# Altium PCB DashBoardLed.PcbDoc
Units mm, origin at the board's own origin, x right, y up, seen from the top; angles counter-clockwise.
Board outline 80 x 50 mm, 2 copper layers (Top Layer, Bottom Layer); 40 components, 57 nets, 211 pads, 53 vias.
Unrouted connection lines stored in the file: 27.
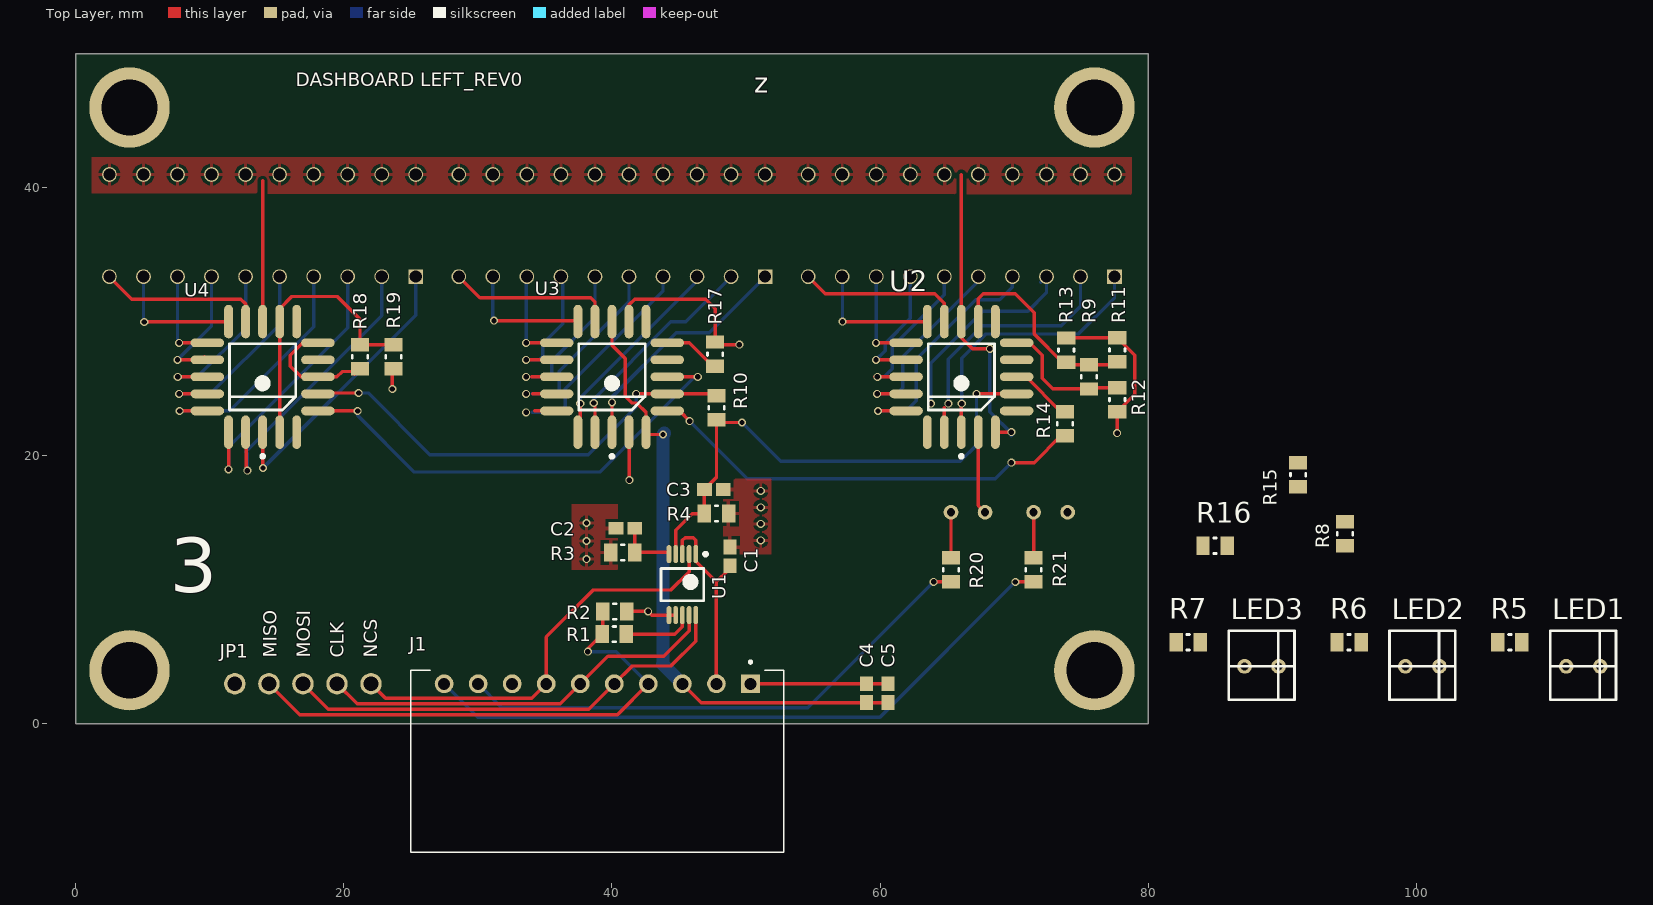
[diagram p0: Top Layer view]
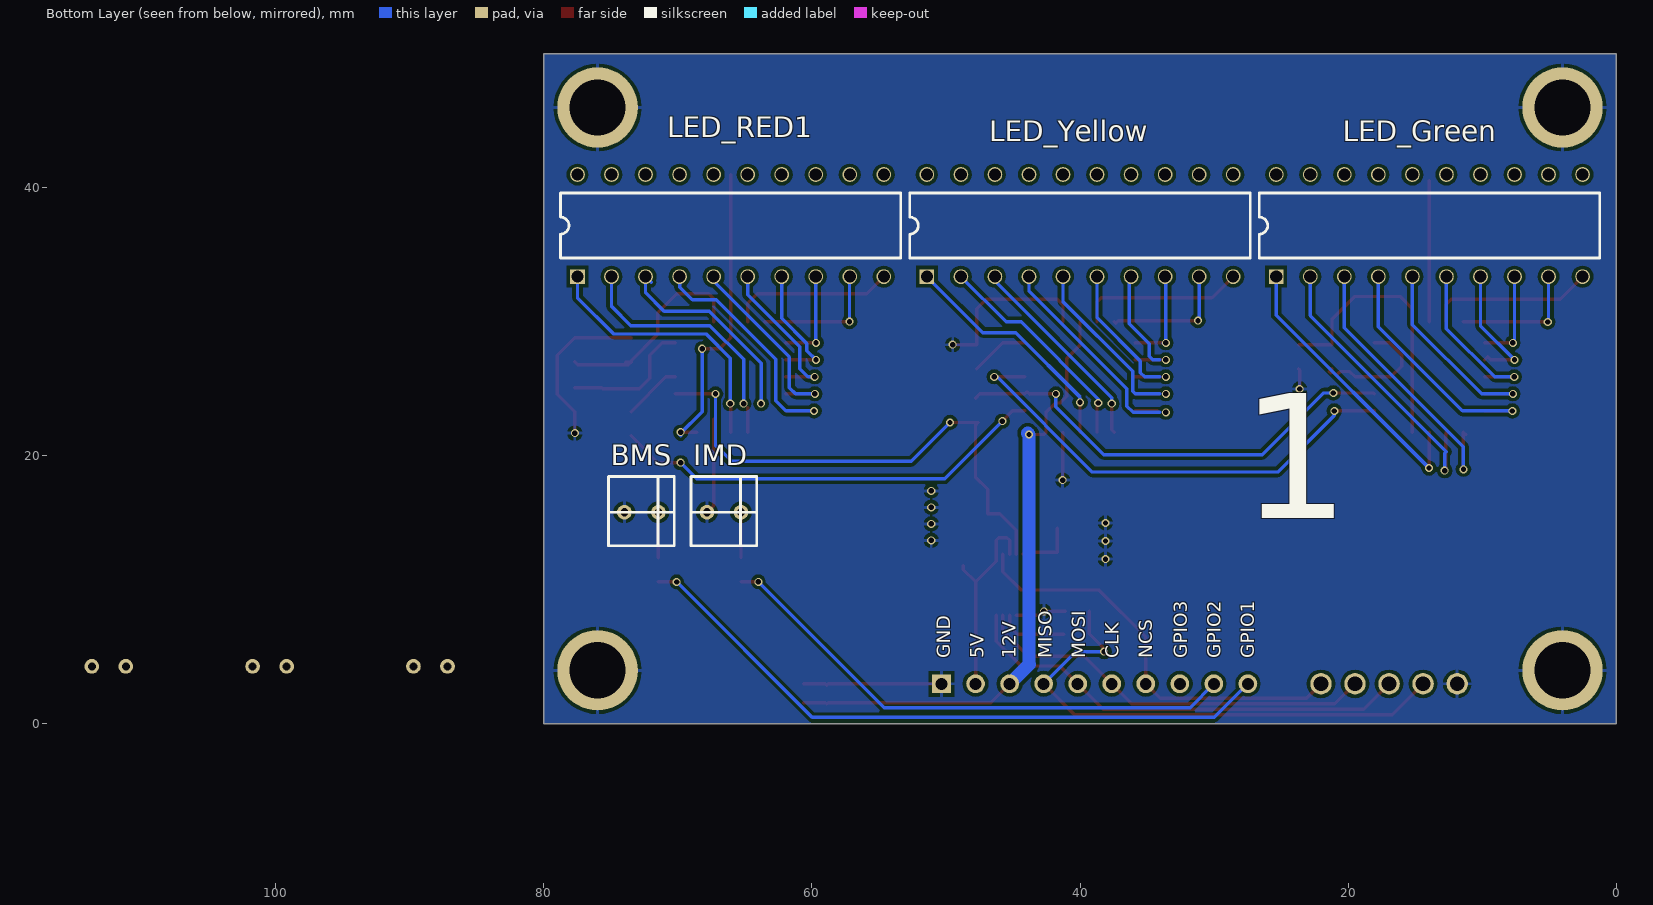
[diagram p1: Bottom Layer view, seen from below]

## Layer stack, top to bottom
Top Solder: solder mask 0.0102, Solder Resist, Dk 3.5
Top Layer: signal copper 0.0356
Dielectric 1: dielectric 0.32, FR-4, Dk 4.8
Bottom Layer: signal copper 0.0356
Bottom Solder: solder mask 0.0102, Solder Resist, Dk 3.5

## Board outline
0,0 80,0 80,50 0,50

## Design rules (kind name [scope] priority, off if disabled: settings)
Clearance [All] p1: gap=0.254 ignorepadtopadclearanceinfootprint=TRUE except(0: Arc-Hole Track-Hole SMDPad-Hole THPad-Hole Via-Hole Fill-Hole Poly-Hole Region-Hole Text-Hole; 0.1: Arc-Arc Arc-Track Arc-SMDPad Track-Track Track-SMDPad)
PolygonConnect [All] p1: connectstyle=Relief reliefconductorwidth=0.254 reliefentries=4 polygonreliefangle="90 Angle" airgapwidth=0.254
RoutingVias [All] p1: holewidth=0.711 width=1.27 viastyle="Through Hole" minholewidth=0.711 minwidth=1.27 maxholewidth=0.711 maxwidth=1.27
SolderMaskExpansion [All] p1: expansion=0.102
Width [All] p1: maxlimit=2 minlimit=0.1 preferedwidth=0.254 minimp=50.000000 maximp=50.000000 favimp=50.000000
30 further rules are at their usual default settings.

## Classes and differential pairs
component class SecondSheet: C4 C5 LED_Green LED_RED1 LED_Yellow R8 R9 R10 R11 R12 R13 R14 R15 R17 R18 R19 U3 U4
component class DAC_Schematic: BMS C1 C2 C3 IMD J1 JP1 LED1 LED2 LED3 R1 R2 R3 R4 R5 R6 R7 R20 R21 U2

## Components (designator, comment, footprint, x,y, rotation, side; value= is the part's Value field where it differs from the comment)
BMS "C503B-RAN-CZ0C0AA1" Diode 74,15.8 r180 bottom
C1 "0.1 uF" CAPC1608X09N 48.8,12.5 r270 top
C2 "0.1 uF" CAPC1608X09N 41,14.6 r0 top
C3 "0.1 uF" CAPC1608X09N 47.6,17.5 r180 top
C4 "0.1 uF" CAPC1608X09N 59,2.3 r90 top
C5 "1nF" CAPC1608X09N 60.6,2.3 r90 top
IMD "C503B-RAN-CZ0C0AA1" Diode 67.84,15.8 r180 bottom
J1 "103635-9" *TE_103635-9 38.904,3 r180 top
JP1 "61300511121" 5PIN_HEADER 22.02,3 r180 top
LED1 "C503B-RAN-CZ0C0AA1" Diode 111.2,4.3 r0 top
LED2 "C503B-RAN-CZ0C0AA1" Diode 99.2,4.3 r0 top
LED3 "C503B-RAN-CZ0C0AA1" Diode 87.2,4.3 r0 top
LED_Green "Green" DIP20 25.36,33.38 r90 bottom
LED_RED1 "RED" DIP20 77.5,33.38 r90 bottom
LED_Yellow "Yellow" DIP20 51.43,33.38 r90 bottom
R1 "1K Ohm" RESC2012X06N 40.174,6.7 r180 top
R2 "2.2k Ohm" RESC2012X06N 40.2,8.4 r180 top
R3 "10k" RESC2012X06N 40.8,12.8 r0 top
R4 "10k" RESC2012X06N 47.8,15.7 r180 top
R5 "220 Ohm" RESC2012X06N 107,6.1 r0 top
R6 "220 Ohm" RESC2012X06N 95,6.1 r0 top
R7 "220 Ohm" RESC2012X06N 83,6.1 r0 top
R8 "0 Ohm" RESC2012X06N 94.7,14.2 r270 top
R9 "2.2k Ohm" RESC2012X06N 75.6,25.9 r270 top
R10 "0 Ohm" RESC2012X06N 47.794,23.6 r270 top
R11 "3.3k Ohm" RESC2012X06N 77.7,27.925 r270 top
R12 "1k" RESC2012X06N 77.7,24.195 r90 top
R13 "0 Ohm" RESC2012X06N 73.9,27.9 r270 top
R14 "0 Ohm" RESC2012X06N 73.8,22.4 r90 top
R15 "0 Ohm" RESC2012X06N 91.2,18.6 r270 top
R16 "0 Ohm" RESC2012X06N 85,13.3 r180 top
R17 "1K Ohm" RESC2012X06N 47.7,27.6 r270 top
R18 "2.2k Ohm" RESC2012X06N 21.2,27.4 r270 top
R19 "3.3k Ohm" RESC2012X06N 23.7,27.4 r90 top
R20 "220 Ohm" RESC2012X06N 65.3,11.5 r90 top
R21 "220 Ohm" RESC2012X06N 71.46,11.5 r90 top
U1 "DAC" TSSOP50P490X110-10N 45.254,10.4 r270 top
U2 "LM3914VX/NOPB" PLCC127P990X990X457-20N 66.07,25.9 r180 top
U3 "LM3914VX/NOPB" PLCC127P990X990X457-20N 40,25.9 r180 top
U4 "LM3914VX/NOPB" PLCC127P990X990X457-20N 13.93,25.9 r180 top

## Footprints (in the part's own frame and the unit in brackets; to place one, negate y for a bottom-side part, rotate by r counter-clockwise, add the part's x,y. Pads: shape width x height; smd on the part's side, far side on the other; paste and mask are expansions set on the pad)
5PIN_HEADER [mm]
  round 1.6 hole 1.1: 1(0,0) 2(2.54,0) 3(5.08,0) 4(7.62,0) 5(10.16,0)
  body extent -1.27,-1.27 11.43,1.27, height 9.5
*TE_103635-9 [mm]
  rect 1.398x1.398 hole 0.89: 1(-11.43,0)
  round 1.398 hole 0.89: 2(-8.89,0) 3(-6.35,0) 4(-3.81,0) 5(-1.27,0) 6(1.27,0) 7(3.81,0) 8(6.35,0) 9(8.89,0) 10(11.43,0)
  silkscreen extent -13.91,-1.72 13.91,12.57, body extent -13.9,-1.02 13.9,12.57, height 7.36
CAPC1608X09N [mm] "Chip Capacitor, 2-Leads, Body 1.60x0.80mm, IPC Medium Density"
  rect 1.1x0.95 smd: 1(-0.7,0) 2(0.7,0)
  body extent -0.85,-0.45 0.85,0.45, height 0.9
Diode [mm]
  round 1.1 hole 0.6: A(0,0) K(2.54,0)
  silkscreen extent -1.18,-2.5 3.72,2.67
DIP20 [mm]
  rect 1.1x1.1 hole 0.9: 1(0,0)
  round 1.1 hole 0.9: 2(0,-2.54) 3(0,-5.08) 4(0,-7.62) 5(0,-10.16) 6(0,-12.7) 7(0,-15.24) 8(0,-17.78) 9(0,-20.32) 10(0,-22.86) 11(7.62,-22.86) 12(7.62,-20.32) 13(7.62,-17.78) 14(7.62,-15.24) 15(7.62,-12.7) 16(7.62,-10.16) 17(7.62,-7.62) 18(7.62,-5.08) 19(7.62,-2.54) 20(7.62,0)
  silkscreen extent 1.38,-24.13 6.24,1.27, body extent -1.14,-23.98 9.01,1.27, height 8
PLCC127P990X990X457-20N [mm] "Leaded Chip Carrier, 20-Leads, Body 9.91x9.91mm, Pitch 1.270mm, IPC Medium Density"
  oval 0.65x2.5 smd: 1(0,4.125) 2(-1.27,4.125) 3(-2.54,4.125) 9(-2.54,-4.125) 10(-1.27,-4.125) 11(0,-4.125) 12(1.27,-4.125) 13(2.54,-4.125) 19(2.54,4.125) 20(1.27,4.125)
  oval 2.5x0.65 smd: 4(-4.125,2.54) 5(-4.125,1.27) 6(-4.125,0) 7(-4.125,-1.27) 8(-4.125,-2.54) 14(4.125,-2.54) 15(4.125,-1.27) 16(4.125,0) 17(4.125,1.27) 18(4.125,2.54)
  silkscreen extent -2.48,-2.47 2.47,6.05, body extent -5.15,-5.41 5.15,4.9, height 4.57
RESC2012X06N [mm] "Chip Resistor, 2-Leads, Body 2.00x1.25mm, IPC Medium Density"
  rect 1x1.35 smd: 1(-0.9,0) 2(0.9,0)
  silkscreen extent -0.1,-0.58 0.1,0.58, body extent -1.05,-0.67 1.05,0.67, height 0.6
TSSOP50P490X110-10N [mm] "TSSOP, 10-Leads, Body 3.00x3.00mm, Pitch 0.50mm, IPC Medium Density"
  oval 1.35x0.35 smd: 1(-2.275,1) 2(-2.275,0.5) 3(-2.275,0) 4(-2.275,-0.5) 5(-2.275,-1) 6(2.275,-1) 7(2.275,-0.5) 8(2.275,0) 9(2.275,0.5) 10(2.275,1)
  silkscreen extent -2.4,-1.6 1.2,1.85, body extent -2.45,-1.6 2.45,1.6, height 1.1

## Part data
BMS IMD LED1 LED2 LED3: "LED Uni-Color Red 2-Pin T-1 3/4 Cardboard", Case/Package=Radial, Color=Red, Forward Voltage=2.1V, Lens Color=Colorless, Manufacturer=Cree, Supplier Part Number 1=C503B-RAN-CZ0C0AA1-ND, Test Current=20mA, ComponentLink1Description=https://www.cree.com/led-components/media/documents/C503B-RAS-RAN-AAS-AAN-RBS-RBN-ABS-ABN-RCS-RCN-ACS-ACN-1079.pdf?src-supplier=Digi-Key, ComponentLink1URL=https://www.cree.com/led-components/media/documents/C503B-RAS-RAN-AAS-AAN-RBS-RBN-ABS-ABN-RCS-RCN-ACS-ACN-1079.pdf?src-supplier=Digi-Key, Dominant Wavelength=624nm, Height=10.1mm, Lens Size=5mm, Lens Style=Round,Domed, Lens Transparency=Clear, Luminous Intensity=20550mcd, Manufacturer Part Number=C503B-RAN-CZ0C0AA1, Mount="Through Hole", Packaging=Bulk, Pricing 1="1=0.15, 10=0.141, 100=0.1303, 1000=0.11653, 50000=0.10821 (USD)", Stock 1=146433, Supplier 1=Digi-Key, Viewing Angle=15°
C1 C2 C3 C4: library part C0603C104Z3VACTU, "KEMET - C0603C104Z3VACTU - Multilayer Ceramic Capacitor, C Series, 0.1 - F, +80%, -20%, Y5V, 25 V, 0603 [1608 Metric] RoHS Compliant: Yes", Capacitance=100nF, Case/Package=0603, Case Code (Metric)=1608, Dielectric=Y5V, Dielectric Material=Ceramic, Manufacturer=KEMET, Max Operating Temperature=85°C, Min Operating Temperature=-30°C, Package Quantity=1, Supplier Part Number 1=399-1100-1-ND, Tolerance=80%, Voltage=25V, Case Code (Imperial)=0603, ComponentLink1Description=http://www.farnell.com/datasheets/1470417.pdf?src-supplier=Element14, ComponentLink1URL=http://www.farnell.com/datasheets/1470417.pdf?src-supplier=Element14, ComponentLink2Description=http://www.farnell.com/datasheets/1828802.pdf?src-supplier=Element14, ComponentLink2URL=http://www.farnell.com/datasheets/1828802.pdf?src-supplier=Element14, ComponentLink3Description=http://www.alliedelec.com/m/d/9bfe7773041ffe9d406e68bc7b377fdd.pdf?src-supplier=Allied+Electronics, ComponentLink3URL=http://www.alliedelec.com/m/d/9bfe7773041ffe9d406e68bc7b377fdd.pdf?src-supplier=Allied+Electronics, Depth=0.8mm, Dissipation Factor=7%, Height=0.8mm, Lead Free="Lead Free", Lead Pitch=0.7mm, Length=1.6mm, Manufacturer Part Number=C0603C104Z3VACTU, Mount="Surface Mount,PCB", Number of Pins=2, Packaging="Tape and Reel", Pricing 1="1=0.1, 10=0.032, 100=0.0143, 500=0.0102, 1000=0.00802 (USD)", Radiation Hardening=No, REACH SVHC="No SVHC", Stock 1=1377515, Supplier 1=Digi-Key, Termination=SMD/SMT, Thickness=0.034inch, Voltage Rating=25V, Voltage Rating (DC)=25V, Width=0.031inch
C5: library part CC0603KRX7R9BB102, "CAP CER 1000PF 50V X7R 0603", Case/Package=0603, Case Code (Metric)=1608, Dielectric=X7R, Insulation Resistance=100GR, Manufacturer=Yageo, Max Operating Temperature=125°C, Min Operating Temperature=-55°C, Package Quantity=1, Supplier Part Number 1=311-1080-1-ND, Tolerance=10%, Voltage=50V, Capacitance=1nF, Case Code (Imperial)=0603, ComponentLink1Description=http://www.yageo.com/documents/recent/UPY-GPHC_X7R_6.3V-to-50V_18.pdf?src-supplier=Digi-Key, ComponentLink1URL=http://www.yageo.com/documents/recent/UPY-GPHC_X7R_6.3V-to-50V_18.pdf?src-supplier=Digi-Key, ComponentLink2Description=http://www.yageo.com/documents/recent/UPY-GPHC_X7R_6.3V-to-50V_8.pdf?src-supplier=Avnet+Europe, ComponentLink2URL=http://www.yageo.com/documents/recent/UPY-GPHC_X7R_6.3V-to-50V_8.pdf?src-supplier=Avnet+Europe, ComponentLink3Description=https://www.verical.com/server-webapp/html/getDatasheet?partID=251790&src-supplier=Verical, ComponentLink3URL=https://www.verical.com/server-webapp/html/getDatasheet?partID=251790&src-supplier=Verical, ComponentLink4Description=http://www.farnell.com/datasheets/2167236.pdf?src-supplier=Element14, ComponentLink4URL=http://www.farnell.com/datasheets/2167236.pdf?src-supplier=Element14, ComponentLink5Description=https://produktinfo.conrad.com/datenblaetter/425000-449999/445532-da-01-en-KERKO_CHIP_0603_NP0_1000PF.pdf?src-supplier=Conrad, ComponentLink5URL=https://produktinfo.conrad.com/datenblaetter/425000-449999/445532-da-01-en-KERKO_CHIP_0603_NP0_1000PF.pdf?src-supplier=Conrad, Composition=Ceramic, Depth=0.8mm, Halogen Free="Halogen Free", Height=0.8mm, Lead Free="Lead Free", Length=1.6mm, Manufacturer Part Number=CC0603KRX7R9BB102, Material=Ceramic, Mount="Surface Mount", Number of Pins=2, Packaging="Tape and Reel", Pricing 1="1=0.1, 10=0.04, 100=0.018, 500=0.01284, 1000=0.01009 (USD)", Radiation Hardening=No, REACH SVHC="No SVHC", Stock 1=5143484, Supplier 1=Digi-Key, Termination=SMD/SMT, Thickness=0.035inch, Voltage Rating=50V, Voltage Rating (DC)=50V, Width=0.031inch
J1: "10 MTE HDR SRRA LATCH .100CL", Package=None, Centerline_Pitch="2.54 mm[.1 in]", Digi-Key_Part_Number=A28643-ND, Digi-Key_Purchase_URL=https://www.digikey.ca/product-detail/en/te-connectivity-amp-connectors/103635-9/A28643-ND/298697?utm_source=snapeda&utm_medium=aggregator&utm_campaign=symbol, EU_RoHS_Compliance="Not Compliant", MF="TE Connectivity", MP=103635-9, Number_of_Positions=10, Product_Type=Connector, SnapEDA_Link=https://www.snapeda.com/parts/103635-9/TE%20Connectivity/view-part/?ref=snap, TE_purchase_URL=https://www.te.com/usa-en/product-103635-9.html?te_bu=Cor&te_type=disp&te_campaign=seda_glo_cor-seda-global-disp-prtnr-fy19-seda-model-bom-cta_sma-317_1&elqCampaignId=32493
JP1: "WURTH ELEKTRONIK         61300511121            Board-To-Board Connector, Vertical, WR-PHD Series, Through Hole, Header, 5 Contacts, 2.54 mm", Color=Black, Manufacturer="Wurth Electronics", Supplier Part Number 1=732-5318-ND, ComponentLink1Description=https://katalog.we-online.de/em/datasheet/6130xx11121.pdf?src-supplier=Digi-Key, ComponentLink1URL=https://katalog.we-online.de/em/datasheet/6130xx11121.pdf?src-supplier=Digi-Key, ComponentLink2Description=http://www.farnell.com/cad/1737268.pdf?src-supplier=Element14, ComponentLink2URL=http://www.farnell.com/cad/1737268.pdf?src-supplier=Element14, Connector Type="Male Pin", Contact Material=Copper, Contact Mating Length=0.236inch, Contact Plating=Gold, Gender=Male, Lead Free="Lead Free", Manufacturer Part Number=61300511121, Mount="Through Hole", Number of Contacts=5, Number of Positions=5, Number of Rows=1, Packaging=Bulk, Pitch=0.1inch, Pricing 1="1=0.25, 10=0.209, 25=0.174, 50=0.145, 100=0.132, 1000=0.12 (USD)", REACH SVHC=Unknown, Stock 1=28976, Supplier 1=Digi-Key, Termination=Solder
LED_Green: library part LTA-1000G, "LED BAR GRAPH 10-SEGMENT GREEN", Case/Package=PDIP, Current=25mA, Forward Voltage=2.6V, Manufacturer="Vishay Lite-On", Max Operating Temperature=85°C, Min Operating Temperature=-35°C, Package Quantity=20, Power Dissipation=75mW, Reverse Voltage=5V, Supplier Part Number 1=160-1067-ND, Test Current=10mA, Voltage Rating=2.1V, Color=Green, ComponentLink1Description=http://optoelectronics.liteon.com/upload/download/DS-30-92-0809/A1000G.pdf?src-supplier=Digi-Key, ComponentLink1URL=http://optoelectronics.liteon.com/upload/download/DS-30-92-0809/A1000G.pdf?src-supplier=Digi-Key, ComponentLink2Description=http://www1.futureelectronics.com/doc/LITE-ON/LITE-ON%20LTA-1000G.pdf?src-supplier=Future+Electronics, ComponentLink2URL=http://www1.futureelectronics.com/doc/LITE-ON/LITE-ON%20LTA-1000G.pdf?src-supplier=Future+Electronics, ComponentLink3Description=http://www.jameco.com/Jameco/Products/ProdDS/697469.pdf?src-supplier=Jameco, ComponentLink3URL=http://www.jameco.com/Jameco/Products/ProdDS/697469.pdf?src-supplier=Jameco, ComponentLink4Description=https://www.verical.com/server-webapp/html/getDatasheet?partID=103036&src-supplier=Verical, ComponentLink4URL=https://www.verical.com/server-webapp/html/getDatasheet?partID=103036&src-supplier=Verical, ComponentLink5Description=http://www.mouser.com/ds/2/239/S_110_A1000G-369759.pdf?src-supplier=Mouser, ComponentLink5URL=http://www.mouser.com/ds/2/239/S_110_A1000G-369759.pdf?src-supplier=Mouser, Depth=10.16mm, Dominant Wavelength=569nm, Forward Current=25mA, Illumination Color=Green, Lead Free="Lead Free", Length=25.27mm, Lens Style=Tinted,Diffused,Rectangular, Luminous Intensity=2mcd, Manufacturer Part Number=LTA-1000G, Mount="Through Hole", Number of Elements=10, Number of LEDs=10, Number of Pins=20, Number of Terminals=20, Packaging=Rail/Tube, Power Rating=75mW, Pricing 1="1=1.4, 10=1.138, 100=0.7, 500=0.595, 1000=0.49, 2500=0.4655, 5000=0.455, 10000=0.4445 (USD)", Radiation Hardening=No, Shape=Rectangular, Stock 1=7635, Supplier 1=Digi-Key, Wavelength=565nm, Width=10.2mm
LED_RED1: library part LTA-1000HR, "LED BAR GRAPH 10-SEGMENT RED", Case/Package=PDIP, Color=Red, Current=25mA, Forward Voltage=2.6V, Manufacturer="Vishay Lite-On", Max Operating Temperature=85°C, Min Operating Temperature=-35°C, Package Quantity=20, Power Dissipation=75mW, Reverse Voltage=5V, Supplier Part Number 1=160-1066-ND, Test Current=10mA, Voltage Rating=2V, ComponentLink1Description=http://optoelectronics.liteon.com/upload/download/DS-30-92-0810/LTA-1000HR.pdf?src-supplier=Digi-Key, ComponentLink1URL=http://optoelectronics.liteon.com/upload/download/DS-30-92-0810/LTA-1000HR.pdf?src-supplier=Digi-Key, ComponentLink2Description=http://www.jameco.com/Jameco/Products/ProdDS/697477.pdf?src-supplier=Jameco, ComponentLink2URL=http://www.jameco.com/Jameco/Products/ProdDS/697477.pdf?src-supplier=Jameco, ComponentLink3Description=http://www.mouser.com/ds/2/239/S_110_LTA-1000HR-369780.pdf?src-supplier=Mouser, ComponentLink3URL=http://www.mouser.com/ds/2/239/S_110_LTA-1000HR-369780.pdf?src-supplier=Mouser, ComponentLink4Description=http://www.onlinecomponents.com/productFiles/mf-LI/2s_110_lta-1000hr.pdf?src-supplier=Onlinecomponents.com, ComponentLink4URL=http://www.onlinecomponents.com/productFiles/mf-LI/2s_110_lta-1000hr.pdf?src-supplier=Onlinecomponents.com, Depth=10.16mm, Dominant Wavelength=623nm, Forward Current=25mA, Illumination Color=Red, Lead Free="Lead Free", Length=25.27mm, Lens Style=Tinted,Diffused,Rectangular, Luminous Intensity=2mcd, Manufacturer Part Number=LTA-1000HR, Mount="Through Hole", Number of Elements=10, Number of LEDs=10, Number of Pins=20, Number of Terminals=20, Packaging=Rail/Tube, Power Rating=75mW, Pricing 1="1=1.4, 10=1.138, 100=0.7, 500=0.595, 1000=0.49, 2500=0.4655, 5000=0.455, 10000=0.4445 (USD)", Radiation Hardening=No, Shape=Rectangular, Stock 1=21663, Supplier 1=Digi-Key, Wavelength=635nm, Width=10.2mm
LED_Yellow: library part LTA-1000Y, "LED BAR GRAPH 10-SEGMENT YELLOW", Case/Package=PDIP, Current=20mA, Forward Voltage=2.6V, Manufacturer="Vishay Lite-On", Max Operating Temperature=85°C, Max Power Dissipation=60mW, Min Operating Temperature=-35°C, Package Quantity=20, Reverse Voltage=5V, Supplier Part Number 1=160-1068-ND, Voltage Rating=2.1V, Color=Yellow, ComponentLink1Description=https://media.digikey.com/pdf/Data%20Sheets/Lite-On%20PDFs/LTA-1000Y.pdf?src-supplier=Digi-Key, ComponentLink1URL=https://media.digikey.com/pdf/Data%20Sheets/Lite-On%20PDFs/LTA-1000Y.pdf?src-supplier=Digi-Key, ComponentLink2Description=http://www.mouser.com/ds/2/239/_100_A1000Y-61118.pdf?src-supplier=Mouser, ComponentLink2URL=http://www.mouser.com/ds/2/239/_100_A1000Y-61118.pdf?src-supplier=Mouser, ComponentLink3Description=https://www.verical.com/server-webapp/html/getDatasheet?partID=145555&src-supplier=Verical, ComponentLink3URL=https://www.verical.com/server-webapp/html/getDatasheet?partID=145555&src-supplier=Verical, Depth=10.16mm, Dominant Wavelength=588nm, Forward Current=20mA, Illumination Color=Yellow, Lead Free="Lead Free", Length=25.27mm, Lens Style=Tinted,Rectangular, Luminous Intensity=2mcd, Manufacturer Part Number=LTA-1000Y, Mount="Through Hole", Number of Elements=10, Number of LEDs=10, Number of Pins=20, Packaging=Rail/Tube, Power Dissipation=60mW, Power Rating=60mW, Pricing 1="1=1.4, 10=1.138, 100=0.7, 500=0.595, 1000=0.49, 2500=0.4655, 5000=0.455, 10000=0.4445 (USD)", Radiation Hardening=No, Stock 1=446, Supplier 1=Digi-Key, Test Current=20mA, Wavelength=588nm, Width=10.16mm
R1 R17: library part RC0805JR-071KL, "RES SMD 1K OHM 5% 1/8W 0805", Case/Package=0805, Case Code (Metric)=2012, Manufacturer=Yageo, Max Operating Temperature=155°C, Min Operating Temperature=-55°C, Power Rating=125mW, Resistance=1kR, Supplier Part Number 1=311-1.0KARDKR-ND, Temperature Coefficient=100ppm/°C, Tolerance=5%, Voltage Rating=150V, Case Code (Imperial)=0805, ComponentLink1Description=http://www.farnell.com/datasheets/2167052.pdf?src-supplier=Verical, ComponentLink1URL=http://www.farnell.com/datasheets/2167052.pdf?src-supplier=Verical, ComponentLink2Description=http://www.farnell.com/datasheets/2167052.pdf?src-supplier=Mouser, ComponentLink2URL=http://www.farnell.com/datasheets/2167052.pdf?src-supplier=Mouser, ComponentLink3Description=http://www.farnell.com/datasheets/2167052.pdf?src-supplier=Element14, ComponentLink3URL=http://www.farnell.com/datasheets/2167052.pdf?src-supplier=Element14, ComponentLink4Description=http://www.farnell.com/datasheets/444164.pdf?src-supplier=Element14, ComponentLink4URL=http://www.farnell.com/datasheets/444164.pdf?src-supplier=Element14, Composition="Thick Film", Contact Plating=Tin,Lead,Matte, Depth=1.25mm, Lead Free="Lead Free", Length=2mm, Manufacturer Part Number=RC0805JR-071KL, Military Standard=Not, Packaging="Tape and Reel", Pricing 1="1=0.1, 10=0.032, 100=0.0132, 1000=0.00594, 2500=0.00515 (USD)", Radiation Hardening=No, REACH SVHC=Unknown, Stock 1=6376783, Supplier 1=Digi-Key, Termination=SMD/SMT
R2 R9 R18: library part RC0805FR-072K2L, "RES SMD 2.2K OHM 1% 1/8W 0805", Case/Package=0805, Case Code (Metric)=2012, Manufacturer=Yageo, Max Operating Temperature=155°C, Max Power Dissipation=125mW, Min Operating Temperature=-55°C, Package Quantity=1, Resistance=2.2kR, Supplier Part Number 1=311-2.20KCRCT-ND, Temperature Coefficient=100ppm/°C, Tolerance=1%, Voltage Rating=150V, Case Code (Imperial)=0805, ComponentLink1Description=http://www.farnell.com/datasheets/38627.pdf?src-supplier=Element14, ComponentLink1URL=http://www.farnell.com/datasheets/38627.pdf?src-supplier=Element14, ComponentLink2Description=http://www.farnell.com/datasheets/444164.pdf?src-supplier=Element14, ComponentLink2URL=http://www.farnell.com/datasheets/444164.pdf?src-supplier=Element14, ComponentLink3Description=http://www.yageo.com/documents/recent/PYu-RC_Group_51_RoHS_L_9.pdf?src-supplier=Digi-Key, ComponentLink3URL=http://www.yageo.com/documents/recent/PYu-RC_Group_51_RoHS_L_9.pdf?src-supplier=Digi-Key, ComponentLink4Description=http://www.yageo.com/documents/recent/PYu-RC_Group_51_RoHS_L_10.pdf?src-supplier=Digi-Key, ComponentLink4URL=http://www.yageo.com/documents/recent/PYu-RC_Group_51_RoHS_L_10.pdf?src-supplier=Digi-Key, Composition="Thick Film", Depth=1.25mm, Features="Moisture Resistant", Height=0.5mm, Lead Free="Lead Free", Lead Pitch=0.4mm, Length=2mm, Manufacturer Part Number=RC0805FR-072K2L, Military Standard=Not, Number of Pins=2, Number of Terminations=2, Packaging="Tape and Reel", Power Rating=125mW, Pricing 1="1=0.1, 10=0.04, 100=0.0163, 1000=0.00731, 2500=0.00635 (USD)", REACH SVHC=Unknown, Stock 1=4627797, Supplier 1=Digi-Key, Termination=SMD/SMT, Voltage Rating (DC)=150V, Width=1.25mm
R3 R4: library part RNCP0805FTD10K0, "RES 10K OHM 1% 1/4W 0805", Case/Package=0805, Case Code (Metric)=2012, Manufacturer="Stackpole Electronics", Max Operating Temperature=155°C, Max Power Dissipation=250mW, Min Operating Temperature=-55°C, Resistance=10kR, Supplier Part Number 1=RNCP0805FTD10K0CT-ND, Temperature Coefficient=100ppm/°C, Tolerance=1%, Case Code (Imperial)=0805, ComponentLink1Description=https://www.seielect.com/catalog/SEI-Packaging.pdf?src-supplier=Digi-Key, ComponentLink1URL=https://www.seielect.com/catalog/SEI-Packaging.pdf?src-supplier=Digi-Key, Composition="Thin Film", Features="Moisture Resistant,Anti-Sulfur", Height=0.024inch, Lead Free="Lead Free", Length=0.079inch, Manufacturer Part Number=RNCP0805FTD10K0, Mount="Surface Mount", Number of Terminations=2, Packaging="Tape and Reel", Pricing 1="1=0.1, 10=0.072, 100=0.0277, 1000=0.0122, 2500=0.01053 (USD)", Stock 1=277525, Supplier 1=Digi-Key, Width=0.049inch
R5 R6 R7 R20 R21: library part CRGCQ0805F220R, "TE CONNECTIVITY - CRGCQ0805F220R - RES, 220R, 1%, 0805, THICK FILM", Manufacturer="TE Connectivity", Supplier Part Number 1=A129741CT-ND, ComponentLink1Description=https://4donline.ihs.com/images/VipMasterIC/IC/TYEL/TYEL-S-A0004929575/TYEL-S-A0004929575-1.pdf?hkey=52A5661711E402568146F3353EA87419&src-supplier=Farnell, ComponentLink1URL=https://4donline.ihs.com/images/VipMasterIC/IC/TYEL/TYEL-S-A0004929575/TYEL-S-A0004929575-1.pdf?hkey=52A5661711E402568146F3353EA87419&src-supplier=Farnell, ComponentLink2Description=https://www.te.com/commerce/DocumentDelivery/DDEController?Action=srchrtrv&amp;DocNm=1773204-3&amp;DocType=DS&amp;DocLang=English&src-supplier=Digi-Key, ComponentLink2URL=https://www.te.com/commerce/DocumentDelivery/DDEController?Action=srchrtrv&amp;DocNm=1773204-3&amp;DocType=DS&amp;DocLang=English&src-supplier=Digi-Key, Manufacturer Part Number=CRGCQ0805F220R, Pricing 1="1=0.1, 10=0.048, 100=0.0196, 1000=0.00882, 2500=0.00766 (USD)", Stock 1=73679, Supplier 1=Digi-Key
R8 R10 R12 R13 R14 R15 R16: library part RMCF0805ZT0R00, "RES 0 OHM JUMPER 1/8W 0805", Case/Package=0805, Case Code (Metric)=2012, Manufacturer="Stackpole Electronics", Max Operating Temperature=155°C, Max Power Dissipation=125mW, Min Operating Temperature=-55°C, Resistance=0mR, Supplier Part Number 1=RMCF0805ZT0R00DKR-ND, Case Code (Imperial)=0805, ComponentLink1Description=https://www.verical.com/server-webapp/html/getDatasheet?partID=360417&src-supplier=Verical, ComponentLink1URL=https://www.verical.com/server-webapp/html/getDatasheet?partID=360417&src-supplier=Verical, Composition="Thick Film", Contact Plating=Tin,Matte, Depth=1.25mm, Features="Automotive AEC-Q200", Height=0.026inch, Lead Free="Lead Free", Length=2mm, Manufacturer Part Number=RMCF0805ZT0R00, Military Standard=Not, Mount="Surface Mount", Number of Terminations=2, Packaging="Tape and Reel", Power Rating=125mW, Pricing 1="1=0.1, 10=0.021, 25=0.0152, 50=0.0116, 100=0.0086, 250=0.00652, 500=0.00522, 1000=0.00385 (USD)", Radiation Hardening=No, Stock 1=1111413, Supplier 1=Digi-Key, Width=0.049inch
R11 R19: library part ERA-6AEB332V, "Thin Film Resistors - SMD 0805 1/8W 3.3Kohms", Case/Package=0805, Case Code (Metric)=2012, Manufacturer=Panasonic, Max Operating Temperature=155°C, Max Power Dissipation=125mW, Min Operating Temperature=-55°C, Package Quantity=1, Resistance=3.3kR, Supplier Part Number 1=P3.3KDADKR-ND, Temperature Coefficient=25ppm/°C, Tolerance=0.1%, Voltage Rating=100V, Case Code (Imperial)=0805, ComponentLink1Description=http://www.farnell.com/datasheets/485442.pdf?src-supplier=Farnell, ComponentLink1URL=http://www.farnell.com/datasheets/485442.pdf?src-supplier=Farnell, ComponentLink2Description=http://uk.rs-online.com/webdocs/0bee/0900766b80beefcc.pdf?src-supplier=RSComponents, ComponentLink2URL=http://uk.rs-online.com/webdocs/0bee/0900766b80beefcc.pdf?src-supplier=RSComponents, ComponentLink3Description=http://industrial.panasonic.com/www-data/pdf/AOA0000/AOA0000CE26.pdf?src-supplier=Future+Electronics, ComponentLink3URL=http://industrial.panasonic.com/www-data/pdf/AOA0000/AOA0000CE26.pdf?src-supplier=Future+Electronics, ComponentLink4Description=https://www.alliedelec.com/m/d/b6b0537e86f421aa7f5975bb1d8f429a.pdf?src-supplier=Allied+Electronics, ComponentLink4URL=https://www.alliedelec.com/m/d/b6b0537e86f421aa7f5975bb1d8f429a.pdf?src-supplier=Allied+Electronics, ComponentLink5Description=http://industrial.panasonic.com/www-data/pdf/AOA0000/AOA0000CE26.pdf?src-supplier=Avnet, ComponentLink5URL=http://industrial.panasonic.com/www-data/pdf/AOA0000/AOA0000CE26.pdf?src-supplier=Avnet, ComponentLink6Description=http://industrial.panasonic.com/www-data/pdf/AOA0000/AOA0000CE26.pdf?src-supplier=Avnet+Europe, ComponentLink6URL=http://industrial.panasonic.com/www-data/pdf/AOA0000/AOA0000CE26.pdf?src-supplier=Avnet+Europe, ComponentLink7Description=http://industrial.panasonic.com/cdbs/www-data/pdf/RDM0000/AOA0000C307.pdf?src-supplier=Farnell, ComponentLink7URL=http://industrial.panasonic.com/cdbs/www-data/pdf/RDM0000/AOA0000C307.pdf?src-supplier=Farnell, ComponentLink8Description=https://www.distrelec.biz/Web/Downloads/_t/ds/ERA_eng_tds.pdf?mime=application%2Fpdf&src-supplier=Distrelec, ComponentLink8URL=https://www.distrelec.biz/Web/Downloads/_t/ds/ERA_eng_tds.pdf?mime=application%2Fpdf&src-supplier=Distrelec, ComponentLink9Description=http://www.farnell.com/datasheets/485442.pdf?src-supplier=Element14, ComponentLink9URL=http://www.farnell.com/datasheets/485442.pdf?src-supplier=Element14, ComponentLink10Description=http://www.farnell.com/datasheets/2052875.pdf?src-supplier=Farnell, ComponentLink10URL=http://www.farnell.com/datasheets/2052875.pdf?src-supplier=Farnell, ComponentLink11Description=http://www.farnell.com/datasheets/2059650.pdf?src-supplier=Farnell, ComponentLink11URL=http://www.farnell.com/datasheets/2059650.pdf?src-supplier=Farnell, ComponentLink12Description=https://produktinfo.conrad.com/datenblaetter/450000-474999/453184-da-01-en-WIDERSTAND_0805_ERA.pdf?src-supplier=Conrad, ComponentLink12URL=https://produktinfo.conrad.com/datenblaetter/450000-474999/453184-da-01-en-WIDERSTAND_0805_ERA.pdf?src-supplier=Conrad, Composition="Thin Film,Metal Film", Contact Plating=Tin, Depth=1.25mm, Features="Automotive AEC-Q200", Height=0.5mm, Lead Free="Lead Free", Length=2mm, Manufacturer Part Number=ERA-6AEB332V, Military Standard=Not, Mount="Surface Mount", Number of Pins=2, Number of Terminations=2, Packaging="Tape and Reel", Power Rating=125mW, Pricing 1="1=0.36, 10=0.302, 100=0.1182, 1000=0.04948, 2500=0.04536 (USD)", Radiation Hardening=No, REACH SVHC="No SVHC", Stock 1=81370, Supplier 1=Digi-Key, Termination=SMD/SMT, Voltage Rating (DC)=100V, Width=1.25mm
U1: library part MCP48FVB02-E/UN, "MICROCHIP - MCP48FVB02-E/UN - DAC, 8BIT, DUAL, MSOP-10", Case/Package=MSOP, Manufacturer=Microchip, Max Operating Temperature=125°C, Min Operating Temperature=-40°C, Supplier Part Number 1=MCP48FVB02-E/UN-ND, ComponentLink1Description=http://www.farnell.com/datasheets/2002391.pdf?src-supplier=Element14, ComponentLink1URL=http://www.farnell.com/datasheets/2002391.pdf?src-supplier=Element14, ComponentLink2Description=http://www.farnell.com/datasheets/2002391.pdf?src-supplier=Farnell, ComponentLink2URL=http://www.farnell.com/datasheets/2002391.pdf?src-supplier=Farnell, ComponentLink3Description=http://www.microchip.com/mymicrochip/filehandler.aspx?ddocname=en576860&src-supplier=Digi-Key, ComponentLink3URL=http://www.microchip.com/mymicrochip/filehandler.aspx?ddocname=en576860&src-supplier=Digi-Key, Differential Output=No, Interface=SPI, Manufacturer Part Number=MCP48FVB02-E/UN, Number of Bits=8, Number of D/A Converters=2, Number of Pins=10, Packaging=Rail/Tube, Pricing 1="1=1.16, 25=0.97, 100=0.88 (USD)", REACH SVHC="No SVHC", Resolution=8b, Settling Time=7.8us, Stock 1=135, Supplier 1=Digi-Key
U2 U3 U4: "LED DRVR 10Segment 20-Pin PLCC T/R", Case/Package=PLCC, Manufacturer="TI National Semiconductor", Max Operating Temperature=70°C, Max Power Dissipation=1.365W, Max Supply Current=9.2mA, Max Supply Voltage=25V, Min Operating Temperature=0°C, Output Current=30mA, Package Quantity=1000, Supplier Part Number 1=LM3914VX/NOPBDKR-ND, ComponentLink1Description=http://www.ti.com/general/docs/lit/getliterature.tsp?genericPartNumber=LM3914&&fileType=pdf&src-supplier=Avnet, ComponentLink1URL=http://www.ti.com/general/docs/lit/getliterature.tsp?genericPartNumber=LM3914&&fileType=pdf&src-supplier=Avnet, ComponentLink2Description=http://www.jameco.com/Jameco/Products/ProdDS/1282476.pdf?src-supplier=Jameco, ComponentLink2URL=http://www.jameco.com/Jameco/Products/ProdDS/1282476.pdf?src-supplier=Jameco, ComponentLink3Description=http://www.ti.com/lit/ds/symlink/lm3914.pdf?src-supplier=Digi-Key, ComponentLink3URL=http://www.ti.com/lit/ds/symlink/lm3914.pdf?src-supplier=Digi-Key, ComponentLink4Description=https://www.verical.com/server-webapp/html/getDatasheet?partID=632645&src-supplier=Verical, ComponentLink4URL=https://www.verical.com/server-webapp/html/getDatasheet?partID=632645&src-supplier=Verical, Display Type=LCD, Lead Free="Lead Free", Manufacturer Part Number=LM3914VX/NOPB, Mount="Surface Mount", Nominal Supply Current=9.2mA, Number of Channels=10, Number of Outputs=10, Number of Pins=20, Number of Segments=10, Packaging="Tape and Reel", Power Dissipation=1.365W, Pricing 1="1=3.82, 10=3.43, 100=2.8099, 500=2.39202 (USD)", Radiation Hardening=No, Stock 1=238, Supplier 1=Digi-Key, Width=8.89mm

## Free pads (board coordinates)
  round 6 hole 4.2 unplated: 2(4,4) 2(4,46) 2(76,4) 2(76,46)

## Via types
v1: diameter 0.6, hole 0.4, Top Layer to Bottom Layer, 53 vias

## Nets (pads, with @x,y where several pads share a name; then routed paths per layer and width w, separated by ;. In a path a pad name is that pad's centre, name@x,y a point inside that pad or via, vN(x,y) a via of type N, cw(c..) or ccw(c..) an arc to the next point about the centre after c; other vN are vias at no path point)
5V: C1.2 J1.2 U1.1 U1.3 | length 15.1
  Top Layer w0.254: U1.3 45.254,13.7 45.454,13.9 46.054,13.9 46.254,13.7 U1.1 46.254,12.146 47.794,10.606 ; J1.2 47.794,10.606 ; C1.2@48.7,11.8 48.7,11.513 47.794,10.606
12V: C4.1 C5.1 J1.3 LED_Green.11 LED_Green.12 LED_Green.13 LED_Green.14 LED_Green.15 LED_Green.16 LED_Green.17 LED_Green.18 LED_Green.19 LED_Green.20 LED_RED1.11 LED_RED1.12 LED_RED1.13 LED_RED1.14 LED_RED1.15 LED_RED1.16 LED_RED1.17 LED_RED1.18 LED_RED1.19 LED_RED1.20 LED_Yellow.11 LED_Yellow.12 LED_Yellow.13 LED_Yellow.14 LED_Yellow.15 LED_Yellow.16 LED_Yellow.17 LED_Yellow.18 LED_Yellow.19 LED_Yellow.20 U2.3 U2.11 U3.3 U3.11 U4.3 U4.11 | length 79.9
  Top Layer w0.254: U4.11 13.93,40.53 ; U3.11 40,28.273 41,27.273 41,24.467 41.518,23.949 41.851,23.949 42.54,23.26 U3.3 42.715,21.6 v1(43.81,21.6) ; J1.3 46.654,1.6 58.8,1.6 C4.1@58.9,1.5 ; C4.1 C5.1 ; 66.07,41 U2.11 66.07,28.83 66.9,28 v1(68.2,28) ; U2.3 v1(69.805,21.775)
  Bottom Layer w0.254: v1(68.2,28) 68.2,23.3 69.9,21.6 69.805,21.505 v1(69.805,21.775)
  Bottom Layer w1: v1@43.9,21.69 v1(43.81,21.6) 43.81,4.464 43.8,4.454 J1.3
BMS_FLT: BMS.K R21.2 | length 3.4
  Top Layer w0.254: R21.2 BMS.K
DAC_OUTPUT1: C3.2 R4.2 R10.2 U1.4 U2.5 | length 39.8
  Top Layer w0.254: U1.4 44.754,14.454 46,15.7 R4.2 C3.2@46.9,17.446 ; C3.2 47.8,18.4 47.8,22.294 47.594,22.5 v1(49.7,22.5) ; v1(67.2,24.63) U2.5
  Bottom Layer w0.254: v1(49.7,22.5) 52.6,19.6 66,19.6 67.2,20.8 v1(67.2,24.63)
DAC_OUTPUT2: C2.2 R3.2 R16.1 U1.5 | length 4.4
  Top Layer w0.254: C2.2 R3.2 44.129,12.8 U1.5
GND: BMS.A C1.1 C2.1 C3.1 C4.2 C5.2 IMD.A J1.1 JP1.5 LED1.A LED2.A LED3.A pad.2 R2.1 R3.1 R4.1 R11.1 R12.1 R13.1 R15.1 R17.1 R19.1 U1.6 U1.7 U2.2 U2.4 U3.2 U3.10 | length 51.4
  Top Layer w0.254: v1(23.614,25) 23.614,26.414 R19.1 ; R2.1 v1(42.7,8.4) 42.975,8.125 U1.6 U1.7 ; U3.2 41.3,21.745 v1(41.3,18.2) ; U3.10 41.27,31.27 41.7,31.7 47,31.7 47.7,31 47.7,28.3 v1(49.5,28.3) ; J1.1 58.8,3 C4.2@58.9,2.9 ; C4.2 C5.2 ; U2.2@67.34,22.74 U2.2 67.34,16.3 IMD.A ; R13.1@73.5,28.8 73.525,28.825 75.6,28.825 R11.1 79,27.525 79,24.595 R12.1 v1(77.7,21.7) v1@77.8,21.6
  other v1: 38.1,12.3 38.1,13.65 51.1,13.7 51.1,14.933 38.1,15 51.1,16.167 51.1,17.4
GPIO_1: J1.10 R5.1 R21.1 | length 49.2
  Top Layer w0.254: v1(70.1,10.6) R21.1
  Bottom Layer w0.254: J1.10 29.974,0.5 60,0.5 v1(70.1,10.6)
GPIO_2: J1.9 R6.1 R20.1 | length 39.9
  Top Layer w0.254: v1(64,10.606) 64.006,10.6 R20.1
  Bottom Layer w0.254: J1.9 31.788,1.225 54.619,1.225 v1(64,10.606)
GPIO_3: J1.8 R7.1
IMD_FLT: IMD.K R20.2 | length 3.4
  Top Layer w0.254: R20.2 IMD.K
LED1_1: LED_RED1.1 U2.1 | length 20.4
  Top Layer w0.254: U2.1 66.07,23.77 v1@66.1,23.8
  Bottom Layer w0.254: v1@66.1,23.8 v1(66.1,23.9) 66.1,27.3 67.9,29.1 74.796,29.1 77.5,31.804 LED_RED1.1
LED1_2: LED_RED1.2 U2.20 | length 18.9
  Top Layer w0.254: U2.20 64.8,23.6
  Bottom Layer w0.254: v1(65.1,23.9) 65.1,27.21 67.615,29.725 73.528,29.725 74.96,31.158 LED_RED1.2
LED1_3: LED_RED1.3 U2.19 | length 15.6
  Bottom Layer w0.254: v1(63.8,23.9) 63.8,26.922 67.678,30.8 71.041,30.8 72.42,32.179 LED_RED1.3 72,32.96
LED1_4: LED_RED1.4 U2.18 | length 18.5
  Top Layer w0.254: v1(59.847,23.36) U2.18
  Bottom Layer w0.254: v1(59.847,23.36) 61.942,23.36 62.7,24.118 62.7,27.211 67.13,31.641 68.92,31.641 69.88,32.601 LED_RED1.4
LED1_5: LED_RED1.5 U2.17 | length 14.9
  Top Layer w0.254: v1(59.79,24.63) U2.17
  Bottom Layer w0.254: v1(59.79,24.63) 61.23,24.63 61.687,25.087 61.687,27.387 67.34,33.04 LED_RED1.5
LED1_6: LED_RED1.6 U2.16 | length 12.2
  Top Layer w0.254: v1@59.6,25.9 v1(59.8,25.9) U2.16
  Bottom Layer w0.254: v1(59.8,25.9) 60.3,25.9 60.9,26.5 60.9,28.141 64.8,32.041 LED_RED1.6
LED1_7: LED_RED1.7 U2.15 | length 9.5
  Top Layer w0.254: v1(59.7,27.17) U2.15
  Bottom Layer w0.254: v1(59.7,27.17) 60.381,27.851 60.381,28.393 62.26,30.272 LED_RED1.7
LED1_8: LED_RED1.8 U2.14 | length 7.2
  Top Layer w0.254: v1(59.7,28.44) U2.14
  Bottom Layer w0.254: v1(59.7,28.44) 59.72,28.46 LED_RED1.8
LED1_9: LED_RED1.9 U2.13 | length 9.7
  Top Layer w0.254: v1(57.2,30.025) U2.13
  Bottom Layer w0.254: LED_RED1.9 57.2,33.36 v1(57.2,30.025)
LED1_10: LED_RED1.10 U2.12 | length 12.4
  Top Layer w0.254: LED_RED1.10 55.92,32.1 64.095,32.1 64.8,31.395 U2.12
LED2_1: LED_Yellow.1 U3.1 | length 17.8
  Top Layer w0.254: U3.1 v1(40,24)
  Bottom Layer w0.254: v1(40,24) 40,24.4 44.8,29.2 47.25,29.2 LED_Yellow.1
LED2_2: LED_Yellow.2 U3.20 | length 16.3
  Top Layer w0.254: U3.20 v1@38.73,23.7
  Bottom Layer w0.254: v1(38.64,23.949) 38.64,24.245 44.395,30 45.51,30 LED_Yellow.2
LED2_3: LED_Yellow.3 U3.19 | length 15.3
  Top Layer w0.254: U3.19 37.634,21.949 v1(37.634,23.9)
  Bottom Layer w0.254: v1(37.634,23.9) 37.634,24.359 46.35,33.075 LED_Yellow.3
LED2_4: LED_Yellow.4 U3.18 | length 17
  Top Layer w0.254: 34.24,23.36 U3.18
  Bottom Layer w0.254: 34.055,23.26 36.038,23.26 36.5,23.722 36.5,25.025 43.81,32.335 LED_Yellow.4
  other v1: 33.6,23.26
LED2_5: LED_Yellow.5 U3.17 | length 14.6
  Top Layer w0.254: 34.1,24.63 U3.17
  Bottom Layer w0.254: 34.055,24.63 35.884,24.63 36.073,24.819 36.073,26.325 41.27,31.522 LED_Yellow.5
  other v1: 33.6,24.63
LED2_6: LED_Yellow.6 U3.16 | length 12.1
  Top Layer w0.254: 34,25.9 U3.16 U3.16@35.98,25.9
  Bottom Layer w0.254: 34.055,25.9 35.179,25.9 35.5,26.221 35.5,27.084 38.73,30.314 LED_Yellow.6
  other v1: 33.6,25.9
LED2_7: LED_Yellow.7 U3.15 | length 9.5
  Top Layer w0.254: 33.93,27.17 U3.15
  Bottom Layer w0.254: 34.055,27.17 34.571,27.17 34.846,27.445 34.846,28.367 36.341,29.862 36.341,33.229 LED_Yellow.7
  other v1: 33.6,27.17
LED2_8: LED_Yellow.8 U3.14 | length 7.5
  Top Layer w0.254: v1(33.6,28.44) v1@33.783,28.44 ; v1@33.796,28.427 v1@33.783,28.44 ; U3.14 35.862,28.427 35.849,28.44 v1@33.783,28.44
  Bottom Layer w0.254: LED_Yellow.8@33.6,33.38 v1(33.6,28.44) 33.76,28.44 v1@33.8,28.4
LED2_9: LED_Yellow.9 U3.13 | length 9.7
  Top Layer w0.254: v1(31.2,30.1) 37.135,30.1 37.335,29.9 U3.13
  Bottom Layer w0.254: LED_Yellow.9 31.11,30.19 v1(31.2,30.1)
LED2_10: LED_Yellow.10 U3.12 | length 12.4
  Top Layer w0.254: LED_Yellow.10 30.15,31.8 38.427,31.8 38.73,31.497 U3.12
LED3_1: LED_Green.1 U4.1 | length 21.7
  Top Layer w0.254: U4.1 13.93,19.13 v1(13.96,19.1)
  Bottom Layer w0.254: v1(13.96,19.1) 25.36,30.5 LED_Green.1
LED3_2: LED_Green.2 U4.20 | length 21.5
  Top Layer w0.254: U4.20 12.6,21.715 12.7,21.615 v1@12.7,19.1
  Bottom Layer w0.254: v1(12.787,18.9) 12.787,20.192 12.66,20.319 22.82,30.479 LED_Green.2
LED3_3: LED_Green.3 U4.19 | length 21.1
  Top Layer w0.254: U4.19@11.2,21.585 U4.19 11.4,21.765 11.39,21.755 v1(11.39,19)
  Bottom Layer w0.254: v1(11.39,19) 11.39,20.69 20.28,29.58 LED_Green.3
LED3_4: LED_Green.4 U4.18 | length 18.4
  Top Layer w0.254: v1(7.74,23.36) U4.18
  Bottom Layer w0.254: v1(7.74,23.36) 11.463,23.36 17.74,29.637 LED_Green.4
LED3_5: LED_Green.5 U4.17 | length 15.3
  Top Layer w0.254: v1(7.7,24.63) U4.17
  Bottom Layer w0.254: v1(7.7,24.63) 10.04,24.63 15.2,29.79 LED_Green.5
LED3_6: LED_Green.6 U4.16 | length 12.6
  Top Layer w0.254: v1(7.6,25.9) U4.16
  Bottom Layer w0.254: v1(7.6,25.9) 9.059,25.9 12.66,29.501 LED_Green.6
LED3_7: LED_Green.7 U4.15 | length 9.7
  Top Layer w0.254: v1(7.58,27.17) 9.345,27.17 9.575,27.4 U4.15
  Bottom Layer w0.254: v1(7.58,27.17) 10.12,29.71 LED_Green.7
LED3_8: LED_Green.8 U4.14 | length 7.2
  Top Layer w0.254: v1(7.707,28.44) U4.14
  Bottom Layer w0.254: LED_Green.8 7.58,28.61 7.75,28.44 v1(7.707,28.44)
LED3_9: LED_Green.9 U4.13 | length 9.7
  Top Layer w0.254: v1(5.1,30) 11.365,30 U4.13
  Bottom Layer w0.254: LED_Green.9 5.04,30.06 v1(5.1,30)
LED3_10: LED_Green.10 U4.12 | length 12.3
  Top Layer w0.254: LED_Green.10 4.18,31.7 12.3,31.7 12.66,31.34 U4.12
"MIBSPI1 CLK": J1.6 JP1.2 U1.9 | length 30.3
  Top Layer w0.254: JP1.2 20.98,1.5 36.134,1.5 J1.6 39.7,5.066 43.866,5.066 45.754,6.954 U1.9
"MIBSPI1 MISO": J1.4 JP1.4 R1.2 R2.2 | length 39.2
  Top Layer w0.254: JP1.4 16.7,0.7 40.414,0.7 J1.4 ; v1(38.2,5.4) 38.2,5.626 R1.2 39.3,6.726 R2.2
  Bottom Layer w0.254: v1(38.2,5.4) 40.314,5.4 J1.4
"MIBSPI1 MOSI": J1.5 JP1.3 U1.10 | length 34.1
  Top Layer w0.254: JP1.3 18.84,1.1 38.274,1.1 J1.5 41.5,4.326 44.4,4.326 46.254,6.18 U1.10
"MIBSPI1 NCS 0": J1.7 JP1.1 U1.2 | length 31.5
  Top Layer w0.254: JP1.1 23.1,1.92 34.014,1.92 J1.7 35.094,6.494 38.6,10 44.4,10 45.754,11.354 U1.2
NetLED1: LED1.K R5.2
NetLED2: LED2.K R6.2
NetLED3: LED3.K R7.2
"R HI": R8.2 R14.2 U2.6 | length 4.4
  Top Layer w0.254: U2.6 70.9,25.9 R14.2@73.5,23.3
"R LO": R14.1 R15.2 U3.4 | length 32.8
  Top Layer w0.254: U3.4 45.04,23.36 v1(45.8,22.6) ; v1(69.8,19.5) 71.5,19.5 R14.1@73.5,21.5
  Bottom Layer w0.254: v1(45.8,22.6) 50.1,18.3 68.6,18.3 v1(69.8,19.5)
R_HiLo: U3.6 U4.4 | length 35.4
  Top Layer w0.254: U4.4 v1(21.023,23.36) ; U3.6 v1(46.4,25.9)
  Bottom Layer w0.254: v1(21.023,23.36) 21.023,23.021 25.244,18.8 39.073,18.8 v1@46.14,25.867
"REF ADJ1": R9.1 R11.2 R13.2 U2.10 | length 15.8
  Top Layer w0.254: U2.10 67.34,31.74 67.7,32.1 70.1,32.1 71.5,30.7 71.5,29.1 73.6,27 R13.2 ; R13.2@73.5,27 73.7,26.8 R9.1 77.475,26.8 R11.2
"REF ADJ3": R18.1 R19.2 U4.2 U4.10 | length 20.7
  Top Layer w0.254: U4.2 U4.10 15.2,31 16.1,31.9 19.5,31.9 21.2,30.2 R18.1 R19.2
"REF OUT1": R8.1 R9.2 R12.2 U2.8 | length 10
  Top Layer w0.254: U2.8 71.16,28.44 72.1,27.5 72.1,25.8 72.9,25 R9.2 75.695,25.095 R12.2
"REF OUT2": R17.2 U3.8 | length 4.4
  Top Layer w0.254: U3.8 45.76,28.44 R17.2@47.7,26.5
"REF OUT 3": R18.2 U4.6 U4.8 | length 9
  Top Layer w0.254: U4.8 16.94,28.44 16,27.5 16,26.7 16.8,25.9 U4.6 19.475,25.9 19.875,26.3 20.6,26.3 R18.2@20.8,26.1 ; R18.2 21.4,26.3 R18.2@21.3,26.2
SD0: R1.1 U1.8 | length 5.2
  Top Layer w0.254: R1.1@41.2,6.7 44.7,6.7 45.254,7.254 U1.8
SIGNAL_IN2: R10.1 R16.2 U3.5 U4.5 | length 34.4
  Top Layer w0.254: U4.5 18.125,24.7 v1(21.1,24.7) ; v1(41.8,24.63) 43.725,24.63 43.755,24.6 43.955,24.8 U3.5 47.47,24.63 R10.1@47.8,24.3
  Bottom Layer w0.254: v1(21.1,24.7) 21.8,24.7 26.4,20.1 38.243,20.1 41.8,23.657 v1(41.8,24.63)
pads on no net: U2.7 U2.9 U3.7 U3.9 U4.7 U4.9

## Polygon pours and split planes (outlines as drawn)
12V on Top Layer "Top Layer-12V" (solid, pour order 58): 1.2,39.6 1.2,42.3 78.8,42.3 78.8,39.5
GND on Top Layer "Top Layer-GND" (solid, pour order 56): 48.3,18.3 48.3,12.675 51.9,12.675 51.9,18.3
GND on Top Layer "Top Layer-GND 1" (solid, pour order 54): 40.414,16.4 40.414,11.536 40.39,11.513 37,11.513 37,16.4
no net on Top Layer "Top Layer-No Net 3" (solid, pour order 50): 56.1,19.3
no net on Top Layer "Top Layer-No Net 4" (solid, pour order 46): 23.925,4.232
no net on Top Layer "Top Layer-No Net 5" (solid, pour order 12): 26.9,4.2
no net on Top Layer "Top Layer-No Net" (solid, pour order 8): 5.7,19.2
no net on Top Layer "Top Layer-No Net 1" (solid, pour order 6): 5.7,19.2
no net on Top Layer "Top Layer-No Net 2" (solid, pour order 0): 3.9,18.9
GND on Bottom Layer "Bottom Layer-GND" (solid, pour order 52): 0,0 0,50 80,50 80,0

## Other copper
Bottom Layer:
  region net "MIBSPI1 MISO": 38.2,5.4

## Silkscreen, mask and mechanical layers (free items; w line width, h text height)
Top Overlay:
  text "DASHBOARD LEFT_REV0" at 16.4,47.6 h1
  text "z" at 50.6,46.6 h2.5
  text "3" at 7,8.5 h7
  text "MISO" at 15,4.935 h1 r90
  text "MOSI" at 17.5,4.935 h1 r90
  text "CLK" at 20,4.935 h1 r90
  text "NCS" at 22.5,4.935 h1 r90
Bottom Overlay:
  text "1" at 28,12.3 h16
  text "GPIO1" at 27,4.9 h1 r270
  text "GPIO2" at 29.5,4.9 h1 r270
  text "GPIO3" at 32,4.9 h1 r270
  text "NCS" at 34.6,4.9 h1 r270
  text "CLK" at 37.1,4.9 h1 r270
  text "MOSI" at 39.6,4.9 h1 r270
  text "MISO" at 42.1,4.9 h1 r270
  text "12V" at 44.8,4.9 h1 r270
  text "5V" at 47.2,4.9 h1 r270
  text "GND" at 49.7,4.9 h1 r270
Mechanical 2:
  the board outline again, w0.254